# Altium PCB sami_updated.PcbDoc
Units mm, origin at the board's own origin, x right, y up, seen from the top; angles counter-clockwise.
Board outline 29.4 x 12.7 mm, 2 copper layers (Top Layer, Bottom Layer); 20 components, 23 nets, 103 pads, 47 vias.
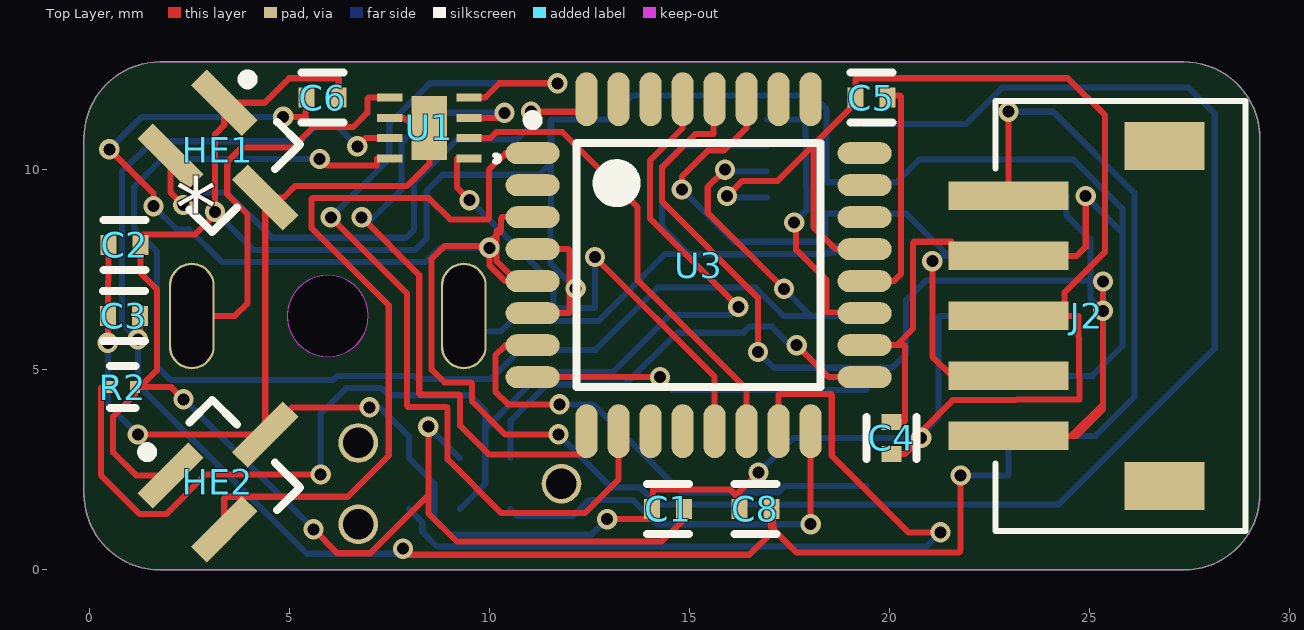
[diagram p0: Top Layer view]
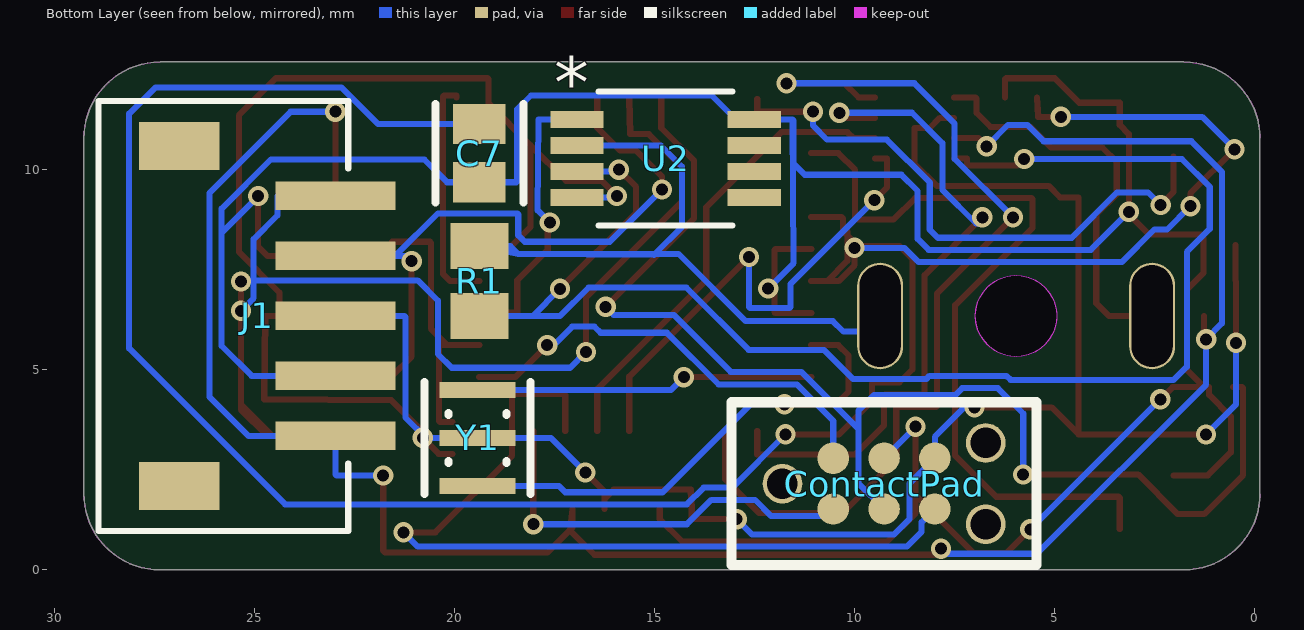
[diagram p1: Bottom Layer view, seen from below]
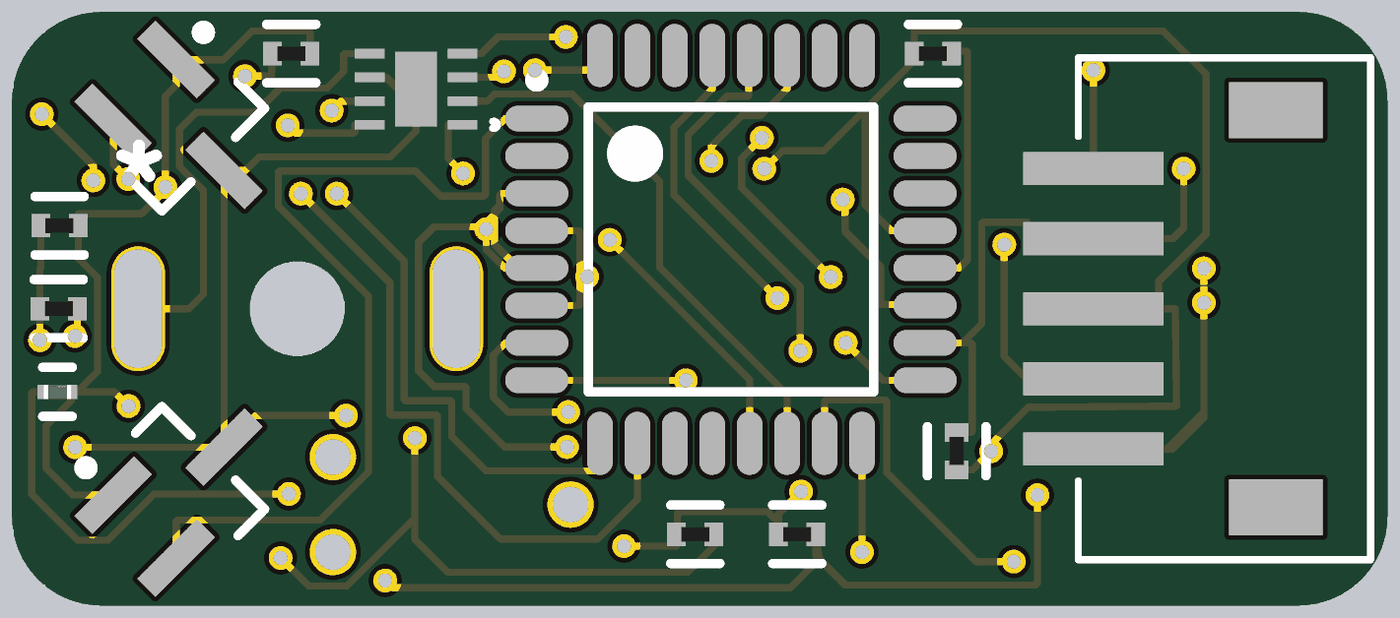
[diagram p2: 3D render of the assembled board from above, using the file's embedded part models]

## Layer stack, top to bottom
Top Solder: solder mask 0.0102, Solder Resist, Dk 3.5
Top Layer: signal copper 0.0356
Dielectric 1: dielectric 0.32, FR-4, Dk 4.8
Bottom Layer: signal copper 0.0356
Bottom Solder: solder mask 0.0102, Solder Resist, Dk 3.5

## Board outline
-0.127,1.905 -0.127,10.795 cw(c1.778,10.795) 1.778,12.7 27.368,12.7 cw(c27.368,10.795) 29.273,10.795 29.273,1.905 cw(c27.368,1.905) 27.368,0 1.778,0 cw(c1.778,1.905)
cut-out: 4.953,6.35 ccw(c5.969,6.35) 5.969,5.334 ccw(c5.969,6.35) 6.985,6.35 ccw(c5.969,6.35) 5.969,7.366 ccw(c5.969,6.35)

## Design rules (kind name [scope] priority, off if disabled: settings)
Clearance Clearance_1 [All] p1: gap=0.152 ignorepadtopadclearanceinfootprint=FALSE except(0: Arc-Hole Track-Hole SMDPad-Hole THPad-Hole Via-Hole Fill-Hole Poly-Hole Region-Hole Text-Hole)
HoleSize [All] p1: absolutevalues=TRUE maxlimit=2.54 minlimit=0.3 maxpercent=80.000 minpercent=20.000
MinimumAnnularRing [All] p1: minimumring=0.15
PolygonConnect [All] p1: connectstyle=Relief reliefconductorwidth=0.254 reliefentries=4 polygonreliefangle="90 Angle" airgapwidth=0.254
RoutingVias [All] p1: holewidth=0.3 width=0.508 viastyle="Through Hole" minholewidth=0.3 minwidth=0.508 maxholewidth=0.3 maxwidth=0.508
SolderMaskExpansion [All] p1: expansion=0.102 istentingtop=FALSE
Width [All] p1: maxlimit=0.254 minlimit=0.152 preferedwidth=0.152 minimp=50.000000 maximp=50.000000 favimp=50.000000
29 further rules are at their usual default settings.

## Components (designator, comment, footprint, x,y, rotation, side; value= is the part's Value field where it differs from the comment)
* "Poluou motor" PCBComponent_1 2.569,6.35 r0 top
C1 "GRM155R71C104KA88D - 0.1 uF" FP-GRM15-MFG 14.478,1.524 r0 top value=0.10μF
C2 "GRM155R71C104KA88D - 0.1 uF" FP-GRM15-MFG 0.889,8.128 r0 top value=0.10μF
C3 "GRM155R71C104KA88D - 0.1 uF" FP-GRM15-MFG 0.87,6.35 r0 top value=0.10μF
C4 "GRM155R71C104KA88D - 0.1 uF" FP-GRM15-MFG 20.066,3.302 r90 top value=0.10μF
C5 "GRM155R71C104KA88D - 0.1 uF" FP-GRM15-MFG 19.558,11.811 r0 top value=0.10μF
C6 "GRM155R71C104KA88D - 0.1 uF" FP-GRM15-MFG 5.842,11.811 r0 top value=0.10μF
C7 "GRM21BR61E106KA73L - 10 uF" FP-GRM21B-0_15-IPC_C 19.39,10.42 r90 bottom
C8 "GRM155R71C104KA88D - 0.1 uF" FP-GRM15-MFG 16.656,1.524 r0 top value=0.10μF
ContactPad "6 Pin Contact Pad" 6PinContactPad 3.937,1.651 r90 bottom
HE1 "TLE4946-2K" INF-PG-SC59_M 3.556,10.16 r315 top
HE2 "TLE4946-2K" INF-PG-SC59_M 3.556,2.54 r45 top
J1 "S5B-ZR-SM4A-TF (LF) (SN)" CONN_S5B-ZR-SM4A-TF_JST 22.987,3.35 r90 bottom
J2 "S5B-ZR-SM4A-TF (LF) (SN)" CONN_S5B-ZR-SM4A-TF_JST 22.987,9.35 r270 top
R1 "RL1220S-R27-F - 0.27 Ohm - 1/3W" RESC2013X50X40NL20T20 19.39,7.22 r90 bottom
R2 "ERJ-1GNF1002C - 10kOhm" FP-ERJ1G-MFG 0.843,4.572 r0 top value=10kΩ
U1 "A3910EEETR-T" DFN-8_ALM 8.509,11.049 r180 top
U2 "INA2180A1IDGKR" DGK8_TEX 14.732,10.287 r180 bottom
U3 "ATmega328-AU" 32A_L 15.24,7.62 r0 top
Y1 "CSTNE16M0V53C000R0 - 16 MHz Crystal" FP-CSTNE16M0V53C000R0-MFG 19.431,3.302 r90 bottom

## Footprints (in the part's own frame and the unit in brackets; to place one, negate y for a bottom-side part, rotate by r counter-clockwise, add the part's x,y. Pads: shape width x height; smd on the part's side, far side on the other; paste and mask are expansions set on the pad)
6PinContactPad [mil]
  round 30.98 smd: 1(-5,260) 2(45,260) 3(-5,210) 4(45,210) 5(-5,160) 6(45,160)
  round 39.02 hole 30 unplated: 25(20,310) 26(-20,110) 27(60,110)
  silkscreen extent -60,60 100,360
32A_L [mm] "Thin QFP, 32-Leads, Body 7x7mm, Pitch 0.8mm, IPC High Density"
  oval 1.35x0.55 smd: 1(-4.15,2.8) 2(-4.15,2) 3(-4.15,1.2) 4(-4.15,0.4) 5(-4.15,-0.4) 6(-4.15,-1.2) 7(-4.15,-2) 8(-4.15,-2.8) 17(4.15,-2.8) 18(4.15,-2) 19(4.15,-1.2) 20(4.15,-0.4) 21(4.15,0.4) 22(4.15,1.2) 23(4.15,2) 24(4.15,2.8)
  oval 0.55x1.35 smd: 9(-2.8,-4.15) 10(-2,-4.15) 11(-1.2,-4.15) 12(-0.4,-4.15) 13(0.4,-4.15) 14(1.2,-4.15) 15(2,-4.15) 16(2.8,-4.15) 25(2.8,4.15) 26(2,4.15) 27(1.2,4.15) 28(0.4,4.15) 29(-0.4,4.15) 30(-1.2,4.15) 31(-2,4.15) 32(-2.8,4.15)
  silkscreen extent -4.27,-3.05 3.05,3.75, body extent -3.5,-3.5 3.5,3.5, height 1.2
CONN_S5B-ZR-SM4A-TF_JST [mil]
  rect 28x118 smd paste+0 mask+0: 1(0,0) 2(59.06,0) 3(118.11,0) 4(177.17,0) 5(236.22,0)
  rect 47x79 smd: 6(-49.21,153.62) 7(285.43,153.62)
  silkscreen extent -93,-13 330,233, body extent 0,0 10,10, height 10
DFN-8_ALM [mil]
  rect 25x8 smd paste+0 mask+0: 1(-39,30) 2(-39,10) 3(-39,-10) 4(-39,-30) 5(39,-30) 6(39,-10) 7(39,10) 8(39,30)
  rect 35x63 smd paste+0 mask+0: 9(0,0)
  silkscreen extent -68,27 -65,33, body extent 0,0 10,10, height 10
DGK8_TEX [mil]
  rect 52.5x17 smd paste+0 mask+0: 1(-87.25,38.39) 2(-87.25,12.8) 3(-87.25,-12.8) 4(-87.25,-38.39) 5(87.25,-38.39) 6(87.25,-12.8) 7(87.25,12.8) 8(87.25,38.39)
  silkscreen extent -66,-66 66,66, body extent 0,0 10,10, height 10
FP-CSTNE16M0V53C000R0-MFG [mm]
  rect 0.4x1.9 smd paste+0 mask+0: 1(-1.2,0) 2(0,0) 3(1.2,0)
  silkscreen extent -1.4,-1.33 1.4,1.33, body extent -1.6,-0.65 1.6,0.65, height 1
FP-ERJ1G-MFG [mm]
  rect 0.25x0.3 smd paste+0 mask+0: 1(-0.3,0) 2(0.3,0)
  silkscreen extent -0.32,-0.53 0.32,0.53, body extent -0.53,-0.27 0.53,0.27, height 0.25
FP-GRM15-MFG [mm]
  rect 0.4x0.5 smd paste+0 mask+0: 1(-0.4,0) 2(0.4,0)
  silkscreen extent -0.53,-0.62 0.53,0.62, body extent -0.7,-0.38 0.7,0.38, height 0.25
FP-GRM21B-0_15-IPC_C [mm]
  rect 1.006x1.308 smd paste+0 mask+0: 1(-0.726,0) 2(0.726,0)
  silkscreen extent -1.23,-1.1 1.23,1.1, body extent -1,-0.63 1,0.63, height 1.4
INF-PG-SC59_M [mm] "SOT23, 3-Leads, Body 3x1.53mm, Pitch 0.95mm, IPC Low Density"
  rect 1.8x0.55 smd: 1(-1.2,0.95) 2(-1.2,-0.95) 3(1.2,0)
  silkscreen extent -1.32,-1.55 0.88,1.9, body extent -0.88,-1.55 0.88,1.55, height 1.35
PCBComponent_1 [mm]
  rrect100% 1.147x2.667 hole 1.02 slot 2.54 at 90 deg: m+(6.8,0) m-(0,0)
RESC2013X50X40NL20T20 [mm] "Chip Resistor, 2-Leads, Body 2.00x1.25mm, IPC Medium Density"
  rect 1.15x1.45 smd: 1(-0.875,0) 2(0.875,0)
  body extent -1.1,-0.72 1.1,0.72, height 0.5

## Part data
C1 C2 C3 C4 C5 C6 C8: library part CMP-2100-03641-2, "CAP CER 0.1UF 16V X7R 0402", Capacitance=0.10μF, Manufacturer=Murata, Manufacturer Part Number=GRM155R71C104KA88D, Package=GRM15, Temperature="-55°C to +125°C", Temperature Characteristic=X7R, Temperature Range High=+125°C, Temperature Range Low=-55°C, Tolerance=10%, Voltage Rating=16Vdc, Category=Cap, ComponentLink2Description=Datasheet, ComponentLink2URL=https://search.murata.co.jp/Ceramy/image/img/A01X/G101/ENG/GRM155R71H471KA01-01A.pdf, Device Class L1="Passive Components", Device Class L2=Capacitors, Device Class L3="Ceramic Capacitors", Digikey Description="CAP CER 0.1UF 16V X7R 0402", Height=0.55mm, Ipc Land Pattern Name=CAPC10050X219, Lead Free=yes, Material=Ceramic, Mouser Description="0402 0.1 uF 16V ±10 % Tolerance X7R SMT Multilayer Ceramic Capacitor", Octopart=https://octopart.com/grm155r71c104ka88d-murata-196880, RoHS=TRUE, Standoff Height=0mm
C7: library part CMP-2007-03541-2, "Chip Multilayer Ceramic Capacitors for General Purpose, 0805, 10uF, X5R, 15%, 10%, 25V", Capacitance=10uF, Case Code (Imperial)=0805, Case Code (Metric)=2012, Dielectric=X5R, Max Operating Temperature=85°C, Min Operating Temperature=-55°C, Package Quantity=1, Tolerance=10%, Voltage=25V, Case/Package=0805, Depth=1.25mm, Height=1.25mm, Lead Free="Lead Free", Length=2mm, Material=Ceramic, Mount="Surface Mount", Packaging="Tape and Reel", Radiation Hardening=No, Termination=SMD/SMT, Thickness=0.053inch, Voltage Rating=25V, Voltage Rating (DC)=25V, Width=0.049inch
HE1 HE2: library part CMP-1148-00006-1, "High Precision Hall Effect Latch, PG-SC59, Reel, Green", Manufacturer=Infineon, Bhyst (25degreesC) max="4Â mT", Bop (25degreesC) min="2Â mT", Brp (25degreesC) typ="-2Â mT", Chopped Hall Technology=TRUE, ComponentLink1Description="Manufacturer URL", ComponentLink1URL=http://www.infineon.com/, ComponentLink2Description=Datasheet, ComponentLink2URL=http://www.infineon.com/dgdl/TLE4946-2K_DS_Rev1.pdf?folderId=db3a30431f848401011facc1c83b4674&fileId=db3a30431f848401011fbc925c48637f, ComponentLink3Description="Package Specification", ComponentLink3URL=http://www.infineon.com/dgdl/SC59-Package_Overview.pdf?folderId=db3a30431936bc4b01194dc0d34440b0&fileId=db3a30431936bc4b01194dd1aa1d40cf, DatasheetVersion="Rev. 1.0", Direction Detection=FALSE, Green=TRUE, Interface="open collector", Mounting Technology="Surface Mount", PackageDescription="3-Pin Semiconductor Package, 3 x 1.53 mm Body, 0.95 mm Pitch", PackageReference=PG-SC59, PackageVersion=Mar-08, Packing=Reel, PartNumber=TLE4946-2K, Target Application=Automotive, Type=Latch
J1 J2: "No Description Available", Mfr_Name=JST, Copyright="Copyright (C) 2021 Ultra Librarian. All rights reserved.", Manufacturer_Part_Number="S5B-ZR-SM4A-TF (LF) (SN)", RefDes=RefDes, Type=DEV
R1: library part CMP-2001-03162-1, Manufacturer=Susumu, Part Number=RL1220S-R27-F
R2: library part CMP-2004-03445-2, "RES SMD 10K OHM 1% 1/20W 0201", Manufacturer="Panasonic Electronic Components", Manufacturer Part Number=ERJ-1GNF1002C, Package=ERJ1G, Power Rating=0.05W, Resistance=10kΩ, Temperature="-55°C to +125°C", Temperature Coefficient=200ppm/°C, Temperature Range High=+125°C, Temperature Range Low=-55°C, Tolerance=1%, Voltage Rating=25V, Automotive=Yes, Automotive Grade="Grade 1", Category=Res, ComponentLink2Description=Datasheet, ComponentLink2URL=https://industrial.panasonic.com/cdbs/www-data/pdf/RDA0000/AOA0000C304.pdf, Composition="Thick Film", Device Class L1="Passive Components", Device Class L2=Resistors, Device Class L3="Chip SMD Resistors", Digikey Description="RES SMD 10K OHM 1% 1/20W 0201", Footprint Url=https://industrial.panasonic.com/cdbs/www-data/pdf/RDA0000/DMA0000COL17.pdf, Height=0.26mm, Lead Free=Yes, Mouser Description="Thick Film Resistors - SMD 0201 10Kohm 1% HalogenFree AEC-Q200", Octopart=https://octopart.com/erj-1gnf1002c-panasonic-55419697, RoHS=TRUE, Series=ERJ
U1: "No Description Available", Mfr_Name="Allegro Microsystems Inc.", Copyright="Copyright (C) 2021 Ultra Librarian. All rights reserved.", Manufacturer_Part_Number=A3910EEETR-T, RefDes=RefDes, Type=DEV
U2: "No Description Available", Mfr_Name="Texas Instruments", Copyright="Copyright (C) 2021 Ultra Librarian. All rights reserved.", Manufacturer_Part_Number=INA2180A1IDGKR, RefDes=RefDes, Type=DEV
U3: library part CMP-0095-00261-2, "8-bit AVR Microcontroller, 32KB Flash, 1KB EEPROM, 2KB SRAM, 32-pin TQFP, Industrial Grade (-40°C to 85°C)", Code_JEDEC=MS-026-ABA, ComponentLink1Description="Manufacturer URL", ComponentLink1URL=http://www.atmel.com/, ComponentLink2Description="ATmega48A/48PA/88A/88PA/168A/168PA/328/328P Datasheet", ComponentLink2URL=http://www.atmel.com/dyn/resources/prod_documents/doc8271.pdf, ComponentLink3Description="ATmega48A/48PA/88A/88PA/168A/168PA/328/328P Summary", ComponentLink3URL=http://www.atmel.com/dyn/resources/prod_documents/8271S.pdf, DatasheetVersion="revD, May-2011", PackageDescription="32-Lead, 7x7x1.0 mm Body, 0.8mm Lead Pitch, Thin Profile Plastic Quad Flat Package (TQFP)", PackageReference=32A, PackageVersion="revC, Oct-2010", RevisionNote="DatasheetVersion & PackageVersion updated. URLs added."
Y1: library part CMP-06057-000009-1, "CERAMIC RES 16.0000MHZ 15PF SMD", Capacitance=15pF, Case/Package=SMD/SMT, Frequency=16MHz, Frequency Stability=0.15%, Frequency Tolerance=0.5%, Max Operating Temperature=125°C, Min Operating Temperature=-40°C, Resistor Type=Ceramic, Impedance=40R, Mount="Surface Mount", Packaging="Tape and Reel"

## Via types
v1: diameter 0.508, hole 0.3, Top Layer to Bottom Layer, 47 vias

## Nets (pads, with @x,y where several pads share a name; then routed paths per layer and width w, separated by ;. In a path a pad name is that pad's centre, name@x,y a point inside that pad or via, vN(x,y) a via of type N, cw(c..) or ccw(c..) an arc to the next point about the centre after c; other vN are vias at no path point)
CUR1_TO_OPAMP_IN+: R1.1 U1.8 U2.3 | length 36.8
  Top Layer w0.152: v1(5.766,10.274) 5.931,10.109 7.175,10.109 7.201,10.135 7.201,10.287 U1.8 ; v1(15.9,10.008) 15.469,9.576 15.469,8.933 v1(17.374,7.028)
  Bottom Layer w0.152: v1(5.766,10.274) 1.823,10.274 1.127,9.579 1.127,8.525 1.702,7.95 1.702,5.08 2.032,4.75 6.108,4.75 6.21,4.851 8.135,4.851 8.217,4.77 10.042,4.77 10.775,5.503 12.656,5.503 14.214,7.061 16.657,7.061 17.374,6.345 18.057,6.345 ; v1(15.9,10.008) 15.946,9.962 U2.3 ; v1(17.374,7.028) 18.057,6.345 ; R1.1 18.057,6.345
CURRENT_IN: U2.1 U3.19 | length 7.2
  Top Layer w0.152: v1(17.628,8.687) 17.678,8.636 17.678,8.006 18.44,7.244 18.44,6.445 U3.19
  Bottom Layer w0.152: U2.1 17.907,11.262 17.932,8.992 v1(17.628,8.687)
GND: C1.1 C2.1 C3.1 C4.1 C5.1 C8.1 ContactPad.6 HE1.3 HE2.3 J1.3 J2.3 U1.6 U1.9 U2.4 U3.21 Y1.2 | length 77
  Top Layer w0.152: v1(0.47,5.677) C3.1 0.47,7.214 0.489,7.233 C2.1 ; v1(1.221,3.389) HE2.3 ; v1(7.01,4.064) 5.08,4.064 HE2.3 ; U1.6 7.874,11.303 8.128,11.049 U1.9 8.509,10.16 7.95,9.601 5.156,9.601 4.866,9.311 HE1.3 HE2.3 ; v1(12.954,1.27) 14.078,1.27 C1.1 14.103,2.007 16.027,2.007 16.256,1.778 ; v1(15.951,9.347) 16.332,9.728 17.221,9.728 18.11,10.617 ; C8.1 16.256,1.778 ; v1(16.739,2.438) 16.256,1.956 16.256,1.778 ; U3.21 18.663,8.02 18.11,8.572 18.11,10.617 ; C4.1 20.403,2.902 v1(20.803,3.302) 20.803,3.454 21.59,4.242 24.765,4.267 24.74,6.35 J2.3@24.384,6.35 ; J2.3 J2.3@24.384,6.35 ; 18.11,10.617 19.158,11.665 C5.1 19.158,12.268 19.183,12.294 24.473,12.294 25.4,11.367 25.4,7.952 24.384,6.936 J2.3@24.384,6.35
  Bottom Layer w0.152: v1(0.47,5.677) 0.47,4.139 v1(1.221,3.389) ; v1(7.01,4.064) 7.264,4.064 8.001,3.327 ContactPad.6 8.636,2.159 8.636,1.27 9.017,0.889 12.573,0.889 v1(12.954,1.27) ; v1(15.951,9.347) 15.986,9.312 U2.4 ; v1(16.739,2.438) 17.602,3.302 Y1.2 v1@20.726,3.302 ; v1(20.803,3.302) v1@20.726,3.302 ; J1.3 21.26,6.35 21.234,6.325 21.234,3.81 v1@20.726,3.302
INPUT1: U1.1 U3.13 | length 12.9
  Top Layer w0.152: U1.1 9.195,10.287 9.195,9.563 v1(9.512,9.246) ; v1(12.649,7.823) 15.64,4.832 U3.13
  Bottom Layer w0.152: v1(9.512,9.246) 11.608,7.15 11.608,6.579 11.633,6.553 12.624,6.553 12.649,6.579 v1(12.649,7.823)
INPUT2: U1.2 U3.14 | length 11.8
  Top Layer w0.152: U1.2 10.033,10.795 10.185,10.947 11.836,10.947 13.716,9.068 13.716,7.244 16.44,4.52 U3.14
INPUT3: U1.3 U3.9 | length 17.3
  Top Layer w0.152: v1(6.815,8.814) 8.255,7.373 8.255,4.407 8.28,4.381 9.246,4.381 9.271,4.356 9.271,3.615 10.002,2.883 12.44,2.883 U3.9 ; U1.3 10.363,11.303 10.389,11.328 v1(10.389,11.43)
  Bottom Layer w0.152: v1(6.815,8.814) 6.815,8.768 6.921,8.661 6.972,8.661 7.81,9.5 7.81,10.668 8.572,11.43 v1(10.389,11.43)
INPUT4: U1.4 U3.10 | length 24.1
  Top Layer w0.152: v1(6.045,8.814) 7.95,6.909 7.95,4.102 7.976,4.077 8.941,4.077 8.966,4.051 8.966,2.766 10.31,1.422 12.395,1.422 13.24,2.267 U3.10 ; U1.4 9.906,11.811 10.262,12.167 v1(11.709,12.167)
  Bottom Layer w0.152: v1(6.045,8.814) 7.506,10.274 7.506,11.16 8.512,12.167 v1(11.709,12.167)
M+: *.m+ R1.2 U2.2 | length 21
  Bottom Layer w0.152: *.m+ 9.369,5.962 10.289,5.962 10.55,6.223 12.73,6.223 14.407,7.899 14.999,7.899 ; U2.2 14.851,10.612 14.326,10.087 14.326,8.572 14.999,7.899 ; 14.999,7.899 18.415,7.899 ; 14.999,7.899 15.018,7.88 18.415,7.899 ; 18.415,7.899 18.611,8.095 R1.2 18.415,7.899
M-: *.m- U1.5 | length 10.2
  Top Layer w0.152: *.m- 3.648,6.35 3.965,6.667 3.965,8.887 3.454,9.398 3.454,10.202 3.81,10.558 5.091,10.558 5.607,11.074 6.604,11.074 6.96,11.43 6.96,11.786 6.985,11.811 U1.5
MISO: ContactPad.1 U3.16 | length 10.3
  Top Layer w0.152: v1(18.04,1.143) U3.16
  Bottom Layer w0.152: ContactPad.1 10.719,1.346 12.09,1.346 12.497,1.753 13.589,1.753 14.199,1.143 v1(18.04,1.143)
MOSI: ContactPad.5 U3.15 | length 21.2
  Top Layer w0.152: U3.15 17.24,4.369 17.265,4.394 18.542,4.394 18.567,4.369 18.567,2.857 20.485,0.94 v1(21.285,0.94)
  Bottom Layer w0.152: ContactPad.5 8.331,1.194 8.331,0.953 8.7,0.584 20.93,0.584 v1(21.285,0.94)
NetC5_2: C5.2 U3.20 | length 5.8
  Top Layer w0.152: U3.20 20.117,7.22 20.295,7.398 20.295,11.836 20.269,11.862 19.958,11.862 C5.2
NetC6_1: C6.1 C7.2 U3.3 U3.5 | length 64.1
  Top Layer w0.152: v1(0.508,10.516) 1.61,9.414 v1(1.61,9.096) ; v1(4.851,11.328) 5.417,11.328 C6.1 ; v1(10.008,8.052) 10.008,7.62 10.408,7.22 U3.5@10.693,7.22 ; U3.5 U3.5@10.693,7.22 ; U3.3 10.331,8.82 10.3,8.788 10.3,8.572 ; v1(11.735,3.391) 10.396,3.391 9.576,4.211 9.576,4.661 9.55,4.686 8.89,4.686 8.56,5.016 8.56,7.772 8.89,8.103 9.919,8.103 10.185,8.369 ; 10.185,8.369 10.185,8.458 10.3,8.572 ; 10.185,8.369 10.185,7.728 U3.5@10.693,7.22 ; 10.185,8.369 10.3,8.484 10.3,8.572
  Bottom Layer w0.152: v1(0.508,10.516) 1.321,11.328 v1(4.851,11.328) ; v1(1.61,9.096) 2.194,8.512 2.512,8.512 3.327,7.696 8.407,7.696 8.763,8.052 v1(10.008,8.052) ; v1(11.735,3.391) 13.068,2.057 13.78,2.057 14.2,1.638 24.244,1.638 28.143,5.537 28.143,11.405 27.483,12.065 22.839,12.065 21.92,11.146 C7.2
NetU3_7: U3.7 Y1.1 | length 12.3
  Top Layer w0.152: U3.7 10.414,5.62 10.16,5.366 10.16,4.458 10.477,4.14 v1(11.76,4.14)
  Bottom Layer w0.152: v1(11.76,4.14) 12.609,4.14 14.806,1.943 17.24,1.943 17.399,2.102 Y1.1
NetU3_8: U3.8 Y1.3 | length 8.5
  Top Layer w0.152: U3.8 v1(14.275,4.82)
  Bottom Layer w0.152: v1(14.275,4.82) 14.593,4.502 Y1.3
Q1: HE1.2 U3.32 | length 14.5
  Top Layer w0.152: HE1.2 2.036,9.446 v1(2.356,9.125) ; v1(11.049,11.455) 12.44,11.455 U3.32
  Bottom Layer w0.152: v1(2.356,9.125) 2.667,9.436 3.448,9.436 4.579,8.306 7.925,8.306 8.128,8.509 8.128,9.69 9.199,10.761 10.697,10.761 11.049,11.112 v1(11.049,11.455)
Q2: HE2.2 U3.1 | length 19.7
  Top Layer w0.152: HE2.2 3.379,1.803 3.405,1.83 6.465,1.83 7.493,2.857 7.493,6.617 5.563,8.548 5.563,9.271 5.588,9.296 8.496,9.296 9.03,8.763 9.97,8.763 9.995,8.788 9.995,10.001 10.414,10.42 U3.1
RESET: ContactPad.3 R2.1 U3.29 | length 31.6
  Top Layer w0.152: R2.1 0.32,4.572 0.294,4.547 0.294,2.373 1.27,1.397 1.93,1.397 2.921,2.388 v1(5.791,2.388) ; U3.29 14.84,11.049 14.021,10.23 14.021,8.788 v1(16.231,6.579)
  Bottom Layer w0.152: v1(5.791,2.388) 5.791,3.912 6.426,4.547 7.315,4.547 7.493,4.369 9.525,4.369 9.906,3.988 9.906,3.523 ; ContactPad.3 9.906,2.159 9.906,3.523 ; v1(16.231,6.579) 16.027,6.375 14.529,6.375 13.106,4.953 11.336,4.953 9.906,3.523
SCK: ContactPad.2 U3.17 | length 11.3
  Top Layer w0.152: v1(17.691,5.62) 18.491,4.82 U3.17
  Bottom Layer w0.152: ContactPad.2 10.541,3.727 11.454,4.64 13.409,4.64 14.701,5.931 16.358,5.931 16.51,6.084 17.069,6.084 17.532,5.62 v1(17.691,5.62)
SCL: J1.5 J2.5 U3.28 | length 30.3
  Top Layer w0.152: U3.28 15.615,10.897 15.153,10.897 14.326,10.069 14.326,9.207 16.723,6.81 v1(16.723,5.451) ; J2.5 24.559,3.35 ; v1(25.349,7.214) v1(25.349,6.477) 25.349,4.14 ; 24.559,3.35 24.689,3.35 25.349,4.01 25.349,4.14 ; 24.559,3.35 25.349,4.14
  Bottom Layer w0.152: v1(16.723,5.451) 17.12,5.055 20.079,5.055 20.422,5.397 20.422,6.731 20.93,7.239 25.032,7.239 ; J1.5 24.435,9.35 24.435,8.865 25.032,8.268 25.032,7.239 ; v1(25.349,6.477) 25.032,6.794 25.032,7.239 ; v1(25.349,7.214) 25.324,7.239 25.032,7.239
SDA: J1.4 J2.4 U3.27 | length 17.9
  Top Layer w0.152: v1(14.821,9.512) 14.821,9.83 15.481,10.49 15.875,10.49 16.44,11.055 U3.27 ; v1(21.082,7.722) 21.082,5.333 21.565,4.85 J2.4
  Bottom Layer w0.152: v1(14.821,9.512) 16.129,8.204 18.254,8.204 18.415,8.366 18.415,8.89 18.44,8.915 20.422,8.915 21.487,7.85 ; v1(21.082,7.722) 21.21,7.85 21.487,7.85 ; J1.4 21.487,7.85
VCC: C1.2 C2.2 C4.2 C6.2 C7.1 ContactPad.4 HE1.1 HE2.1 J1.2 J2.2 R2.2 U2.8 U3.4 U3.6 U3.18 | length 93
  Top Layer w0.152: HE2.1 1.178,2.363 0.599,2.942 0.599,3.835 1.143,4.379 R2.2 1.27,4.572 ; v1(2.362,4.267) 2.057,4.572 1.27,4.572 ; v1(5.613,1.016) 6.211,0.419 7.031,0.419 8.484,1.872 ; C6.2 6.242,12.268 6.217,12.294 5.004,12.294 4.39,11.68 HE1.1 3.379,11.126 3.15,10.897 v1(3.15,8.954) 3.15,8.89 2.642,8.382 1.289,8.382 C2.2 1.289,7.423 1.702,7.01 1.702,5.004 1.27,4.572 ; v1(8.484,3.581) 8.484,1.872 ; U3.6 11.989,6.42 12.014,6.445 v1@12.014,7.036 ; U3.4 11.989,8.02 12.014,7.995 v1@12.014,7.036 ; v1(12.167,7.036) v1@12.014,7.036 ; C1.2 14.878,1.27 14.319,0.711 9.195,0.711 8.484,1.422 8.484,1.872 ; U3.18 20.187,5.62 ; C4.2 20.371,3.702 20.396,3.727 20.396,5.595 20.371,5.62 20.187,5.62 ; v1(24.917,9.347) 24.917,8.079 24.689,7.85 J2.2 21.565,7.85 21.565,8.204 20.625,8.204 20.599,8.179 20.599,6.032 20.187,5.62
  Bottom Layer w0.152: v1(2.362,4.267) v1(5.613,1.016) ; v1(3.15,8.954) 4.102,8.001 8.153,8.001 8.433,8.28 8.433,9.474 8.839,9.881 11.252,9.881 11.532,10.16 11.532,11.237 11.557,11.262 ; v1(8.484,3.581) ContactPad.4 ; v1(12.167,7.036) 11.532,7.671 11.557,11.262 ; J1.2 25.082,4.85 25.832,5.599 25.832,8.433 ; v1(24.917,9.347) 25.832,8.433 ; 11.557,11.262 U2.8 12.979,11.262 13.579,11.862 18.098,11.862 18.44,11.519 18.44,9.719 18.466,9.694 C7.1 20.193,9.694 20.761,10.262 24.6,10.262 25.832,9.03 25.832,8.433
VM: C3.2 C8.2 J1.1 J2.1 U1.7 | length 56.4
  Top Layer w0.152: v1(1.219,5.766) 1.27,5.817 C3.2 ; v1(6.706,10.592) 6.909,10.795 U1.7 ; v1(7.849,0.533) 8.001,0.381 16.51,0.381 17.126,0.997 ; v1(21.791,2.362) 21.791,0.483 21.744,0.436 17.687,0.436 17.126,0.997 ; J2.1 v1(22.987,11.455) ; 17.126,0.997 17.056,1.067 C8.2 17.126,0.997
  Bottom Layer w0.152: v1(6.706,10.592) 6.172,11.125 5.69,11.125 5.283,10.719 1.587,10.719 0.823,9.954 0.823,6.162 v1(1.219,5.766) 1.219,4.635 5.448,0.406 7.722,0.406 v1(7.849,0.533) ; v1(21.791,2.362) 22.962,2.362 22.987,2.388 J1.1 25.162,3.35 26.137,4.325 26.137,9.423 24.105,11.455 v1(22.987,11.455)
pads on no net: ContactPad.25 ContactPad.26 ContactPad.27 J1.6 J1.7 J2.6 J2.7 U2.5 U2.6 U2.7 U3.2 U3.11 U3.12 U3.22 U3.23 U3.24 U3.25 U3.26 U3.30 U3.31

## Keep-outs
Keep-Out Layer:
  circle w0.013: c5.969,6.35 r1.016
  lines w0.013: -0.127,1.905 ccw(c1.778,1.905) 1.778,0 27.368,0 ccw(c27.368,1.905) 29.273,1.905 29.273,3.492 29.273,7.938 29.273,10.795 ccw(c27.368,10.795) 27.368,12.7 1.778,12.7 ccw(c1.778,10.795) -0.127,10.795 -0.127,1.905

## Text inside footprints (layer, text, board x,y; h text height)
U2: Bottom Overlay "*" at 17.52,11.567 h1.27; Mechanical 13 "*" at 16.218,10.49 h1.27